# Altium PCB PCB1.PcbDoc (part 2 of 2)
Units mm, origin at the board's own origin, x right, y up, seen from the top; angles counter-clockwise.
Board outline 85.47 x 84.33 mm, 4 copper layers (Top Layer, Internal Plane 1, Internal Plane 2, Bottom Layer); 65 components, 57 nets, 335 pads, 113 vias.
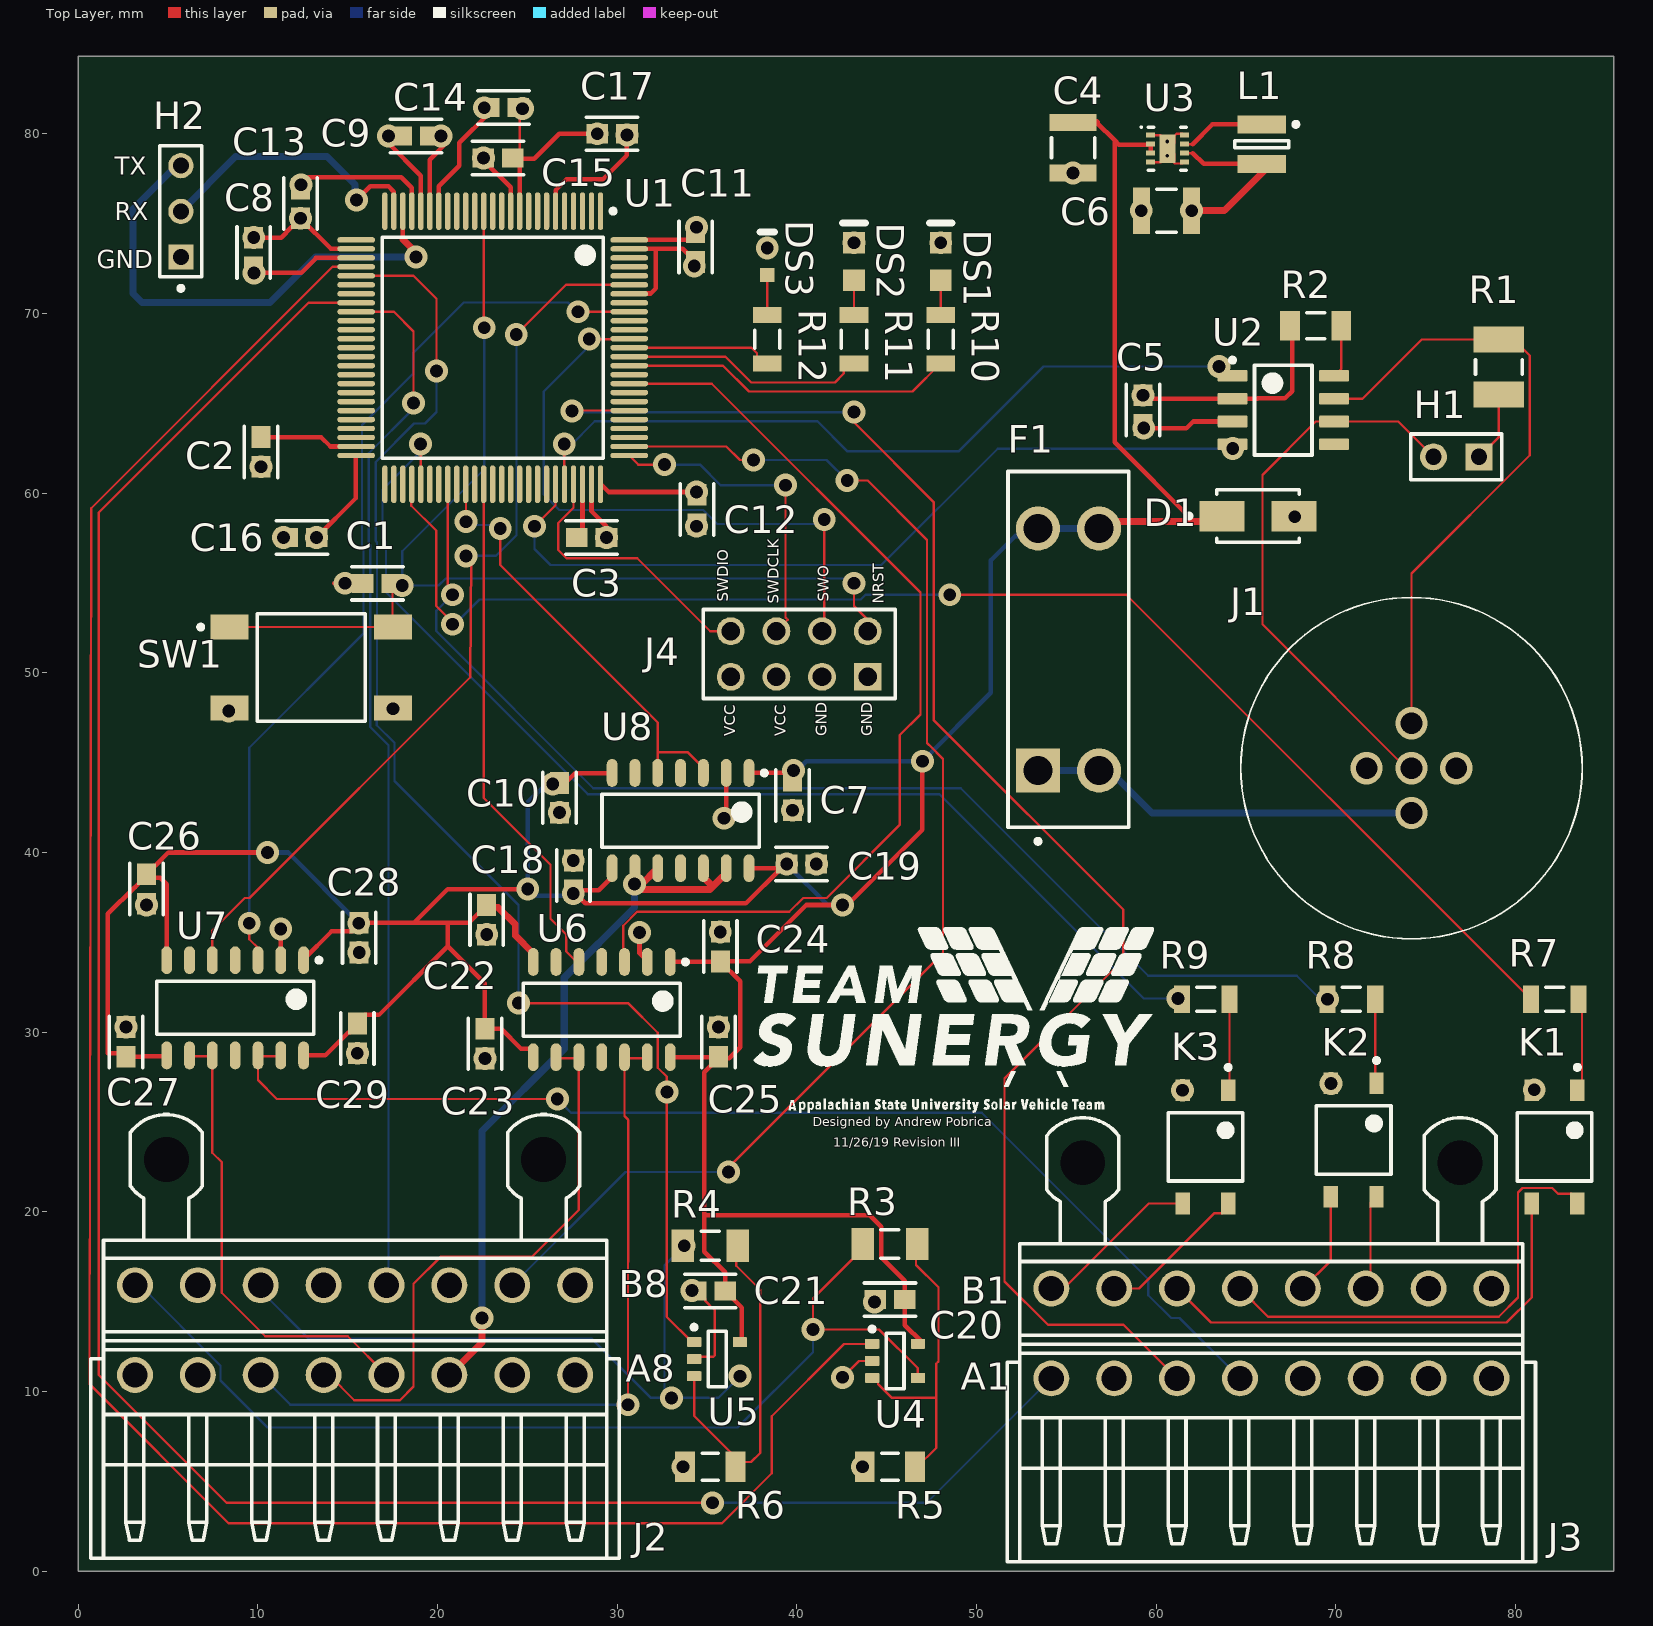
[diagram p0: Top Layer view]

## Via types
v1: diameter 1.27, hole 0.711, Top Layer to Bottom Layer, 106 vias
v2: diameter 1.8, hole 1.2, Top Layer to Bottom Layer, 5 vias
v3: diameter 0.5, hole 0.2, Top Layer to Bottom Layer, 2 vias

## Nets (pads, with @x,y where several pads share a name; then routed paths per layer and width w, separated by ;. In a path a pad name is that pad's centre, name@x,y a point inside that pad or via, vN(x,y) a via of type N, cw(c..) or ccw(c..) an arc to the next point about the centre after c; other vN are vias at no path point) (continued)
NetU1_92: (continued)
  Bottom Layer w0.127: v1(9.525,36.068) 9.525,45.843 15.875,52.193 15.875,56.948 15.797,57.025 15.797,63.803 18.642,66.648 18.642,67.791 21.463,70.612 27.259,70.612 27.767,70.104 v1(27.813,70.104)
NetU1_95: U1.95 U7.5 | length 50.7
  Top Layer w0.127: U7.5@7.469,34.063 7.469,35.663 9.278,37.472 9.532,37.472 21.82,49.76 21.871,56.501 21.857,56.515 v1(21.59,56.515) ; v1(24.384,68.834) 27.152,71.602 U1.95
  Bottom Layer w0.127: v1(21.59,56.515) 23.246,56.515 24.397,57.666 24.397,68.821 v1(24.384,68.834)
VCC: C5.1 C6.2 C8.2 C9.2 C11.2 C12.2 C13.2 C14.1 C15.1 C16.1 C17.1 J2.A1 J4.5 J4.7 L1.2 U1.6 U1.11 U1.19 U1.21 U1.22 U1.28 U1.50 U1.75 U1.100 U2.3 U3.6 | length 66.8
  Top Layer w0.127: J2.A1 J2.A1@3.556,10.922 ; v1@17.272,79.474 v1(17.272,79.883) ; C11.2@33.944,74.102 C11.2 34.417,74.575 v1(34.417,74.803) ; U3.6 62.04,78.93
  Top Layer w0.254: v1(9.779,72.263) 12.425,72.263 13.232,73.07 ; v1(12.405,77.175) 12.827,77.597 17.976,77.597 18.57,77.003 U1.22 ; 13.232,73.102 U1.28 ; v1(13.272,57.544) 15.439,59.711 U1.50@15.439,62.071 ; v1@17.272,79.474 19.074,77.672 U1.21@19.074,75.991 ; U1.19 20.07,77.092 21.209,78.231 21.209,79.502 22.844,81.137 22.606,81.375 v1(22.606,81.454) ; C15.1 v1(22.561,78.66) C15.1@22.579,78.66 ; C15.1@22.616,78.66 C15.1@22.579,78.66 ; U1.11@24.07,76.327 24.07,77.022 22.579,78.513 C15.1@22.579,78.66 ; U1.6 26.57,76.862 27.178,77.47 29.21,77.47 30.544,78.804 v1(30.544,79.946) ; U1.75@29.101,60.502 29.532,60.071 v1(34.417,60.071) ; U1.100 C11.2@33.944,74.102 ; v1(59.309,63.627) 61.684,63.627 62.052,63.995 U2.3 ; 62.04,78.93 62.64,78.33 L1.2 L1.2@66.392,78.33
  Top Layer w0.381: v1(61.973,75.73) 63.792,75.73 L1.2@66.392,78.33
pads on no net: J1.1 J2.0 J2.A7 J2.A8 J3.0 J3.A5 J3.A6 J3.A7 J3.A8 J3.B7 J3.B8 U1.1 U1.2 U1.3 U1.4 U1.5 U1.7 U1.8 U1.9 U1.12 U1.13 U1.15 U1.16 U1.17 U1.18 U1.25 U1.26 U1.31 U1.32 U1.35 U1.36 U1.37 U1.38 U1.39 U1.40 U1.41 U1.42 U1.43 U1.44 U1.45 U1.46 U1.47 U1.48 U1.51 U1.52 U1.53 U1.56 U1.57 U1.59 U1.61 U1.63 U1.64 U1.65 U1.66 U1.67 U1.68 U1.69 U1.78 U1.79 U1.80 U1.82 U1.83 U1.85 U1.90 U1.91 U1.93 U1.96 U1.97 U1.98 U2.5 U6.4 U6.6 U6.11 U7.4 U7.6 U7.11 U8.4 U8.6 U8.11
copper on no net:
  other v2: 71.708,44.704

## Polygon pours and split planes (outlines as drawn)
GND on Internal Plane 1 (split plane): 84.961,0.51 0.51,0.51 0.51,83.818 84.961,83.818
VCC on Internal Plane 2 (split plane): 84.961,0.51 0.51,0.51 0.51,83.818 84.961,83.818

## Silkscreen, mask and mechanical layers (free items; w line width, h text height)
Top Overlay:
  drawing of 75 lines, arcs and shapes, not listed
  text "TX" at 2.032,77.724 h1
  text "RX" at 2.032,75.184 h1
  text "GND" at 1.032,72.517 h1
  text "SWDIO" at 36.195,53.975 h0.6 r90
  text "SWO" at 41.783,53.975 h0.6 r90
  text "SWDCLK" at 38.989,53.848 h0.6 r90
  text "NRST" at 44.831,53.848 h0.6 r90
  text "VCC" at 36.576,46.482 h0.6 r90
  text "VCC" at 39.37,46.482 h0.6 r90
  text "GND" at 41.656,46.482 h0.6 r90
  text "GND" at 44.196,46.482 h0.6 r90
  text "Designed by Andrew Pobrica" at 40.894,24.765 h0.52
  text "11/26/19 Revision III" at 42.037,23.622 h0.52

## Text inside footprints (layer, text, board x,y; h text height)
J2: Top Overlay "A8" at 30.48,10.541 h1.5; Top Overlay "B8" at 30.099,15.24 h1.5
J3: Top Overlay "A1" at 49.11,10.091 h1.5; Top Overlay "B1" at 49.11,14.891 h1.5